# Altium PCB pcbBBB.PcbDoc
Units mm, origin at the board's own origin, x right, y up, seen from the top; angles counter-clockwise.
Board outline 38.02 x 45.73 mm, 2 copper layers (Top Layer, Bottom Layer); 10 components, 47 nets, 39 pads, 0 vias.
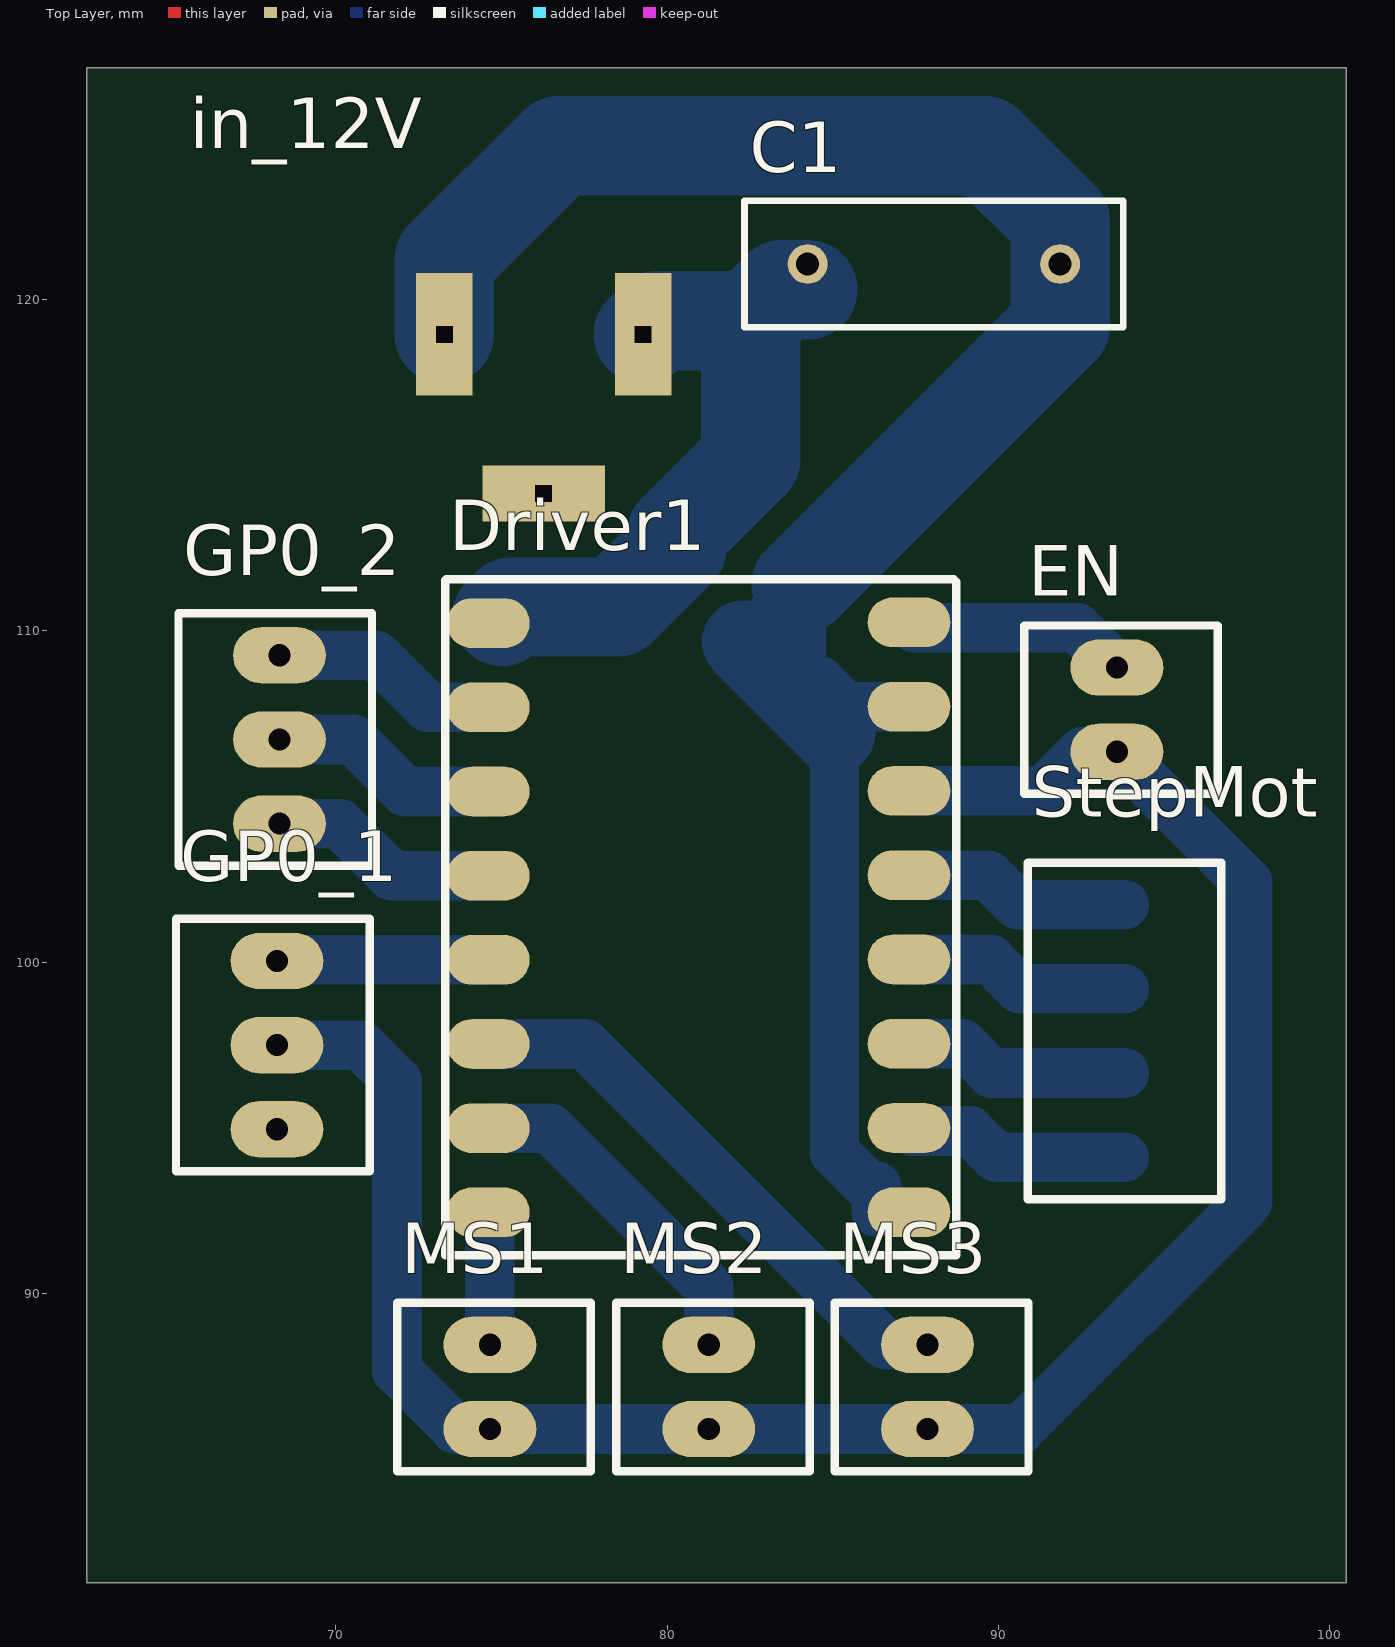
[diagram p0: Top Layer view]
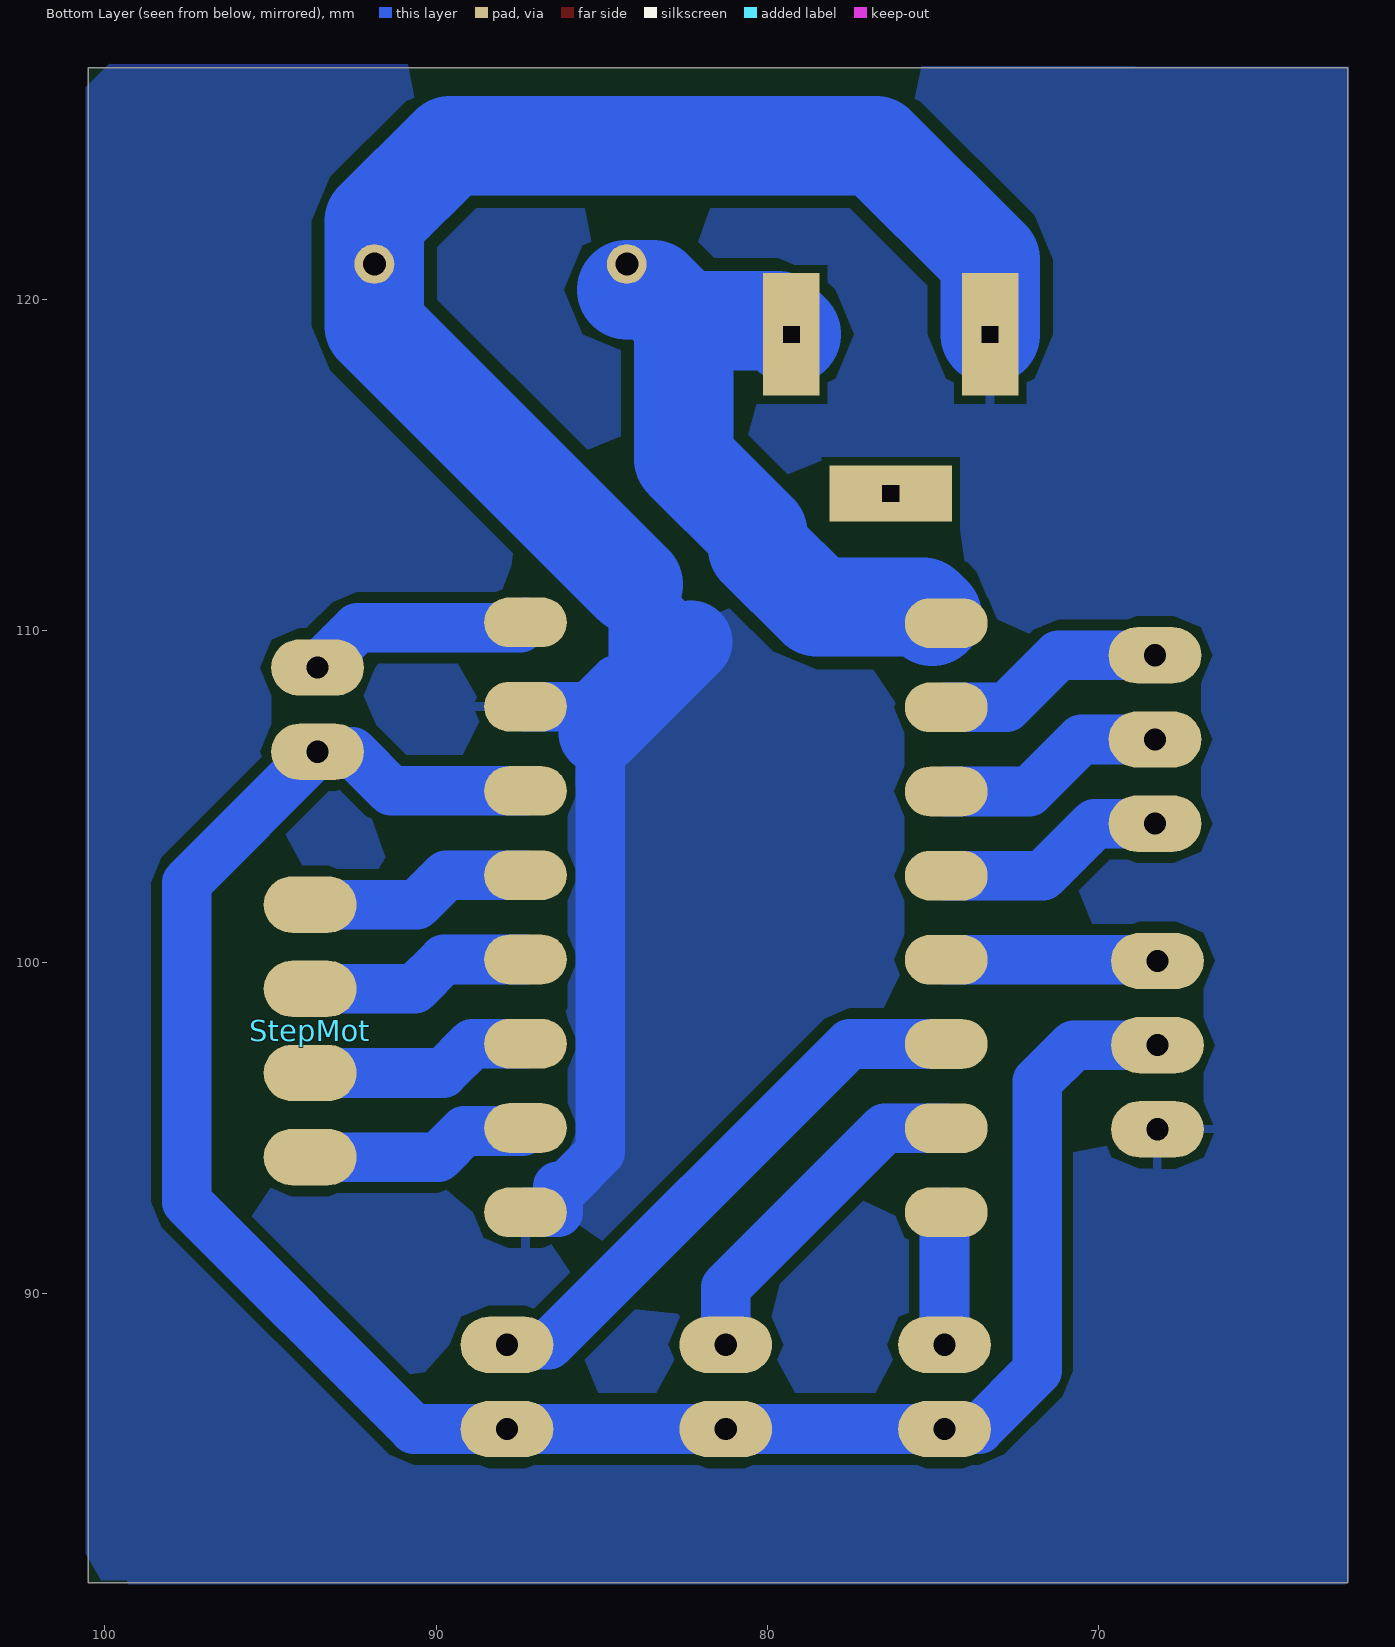
[diagram p1: Bottom Layer view, seen from below]
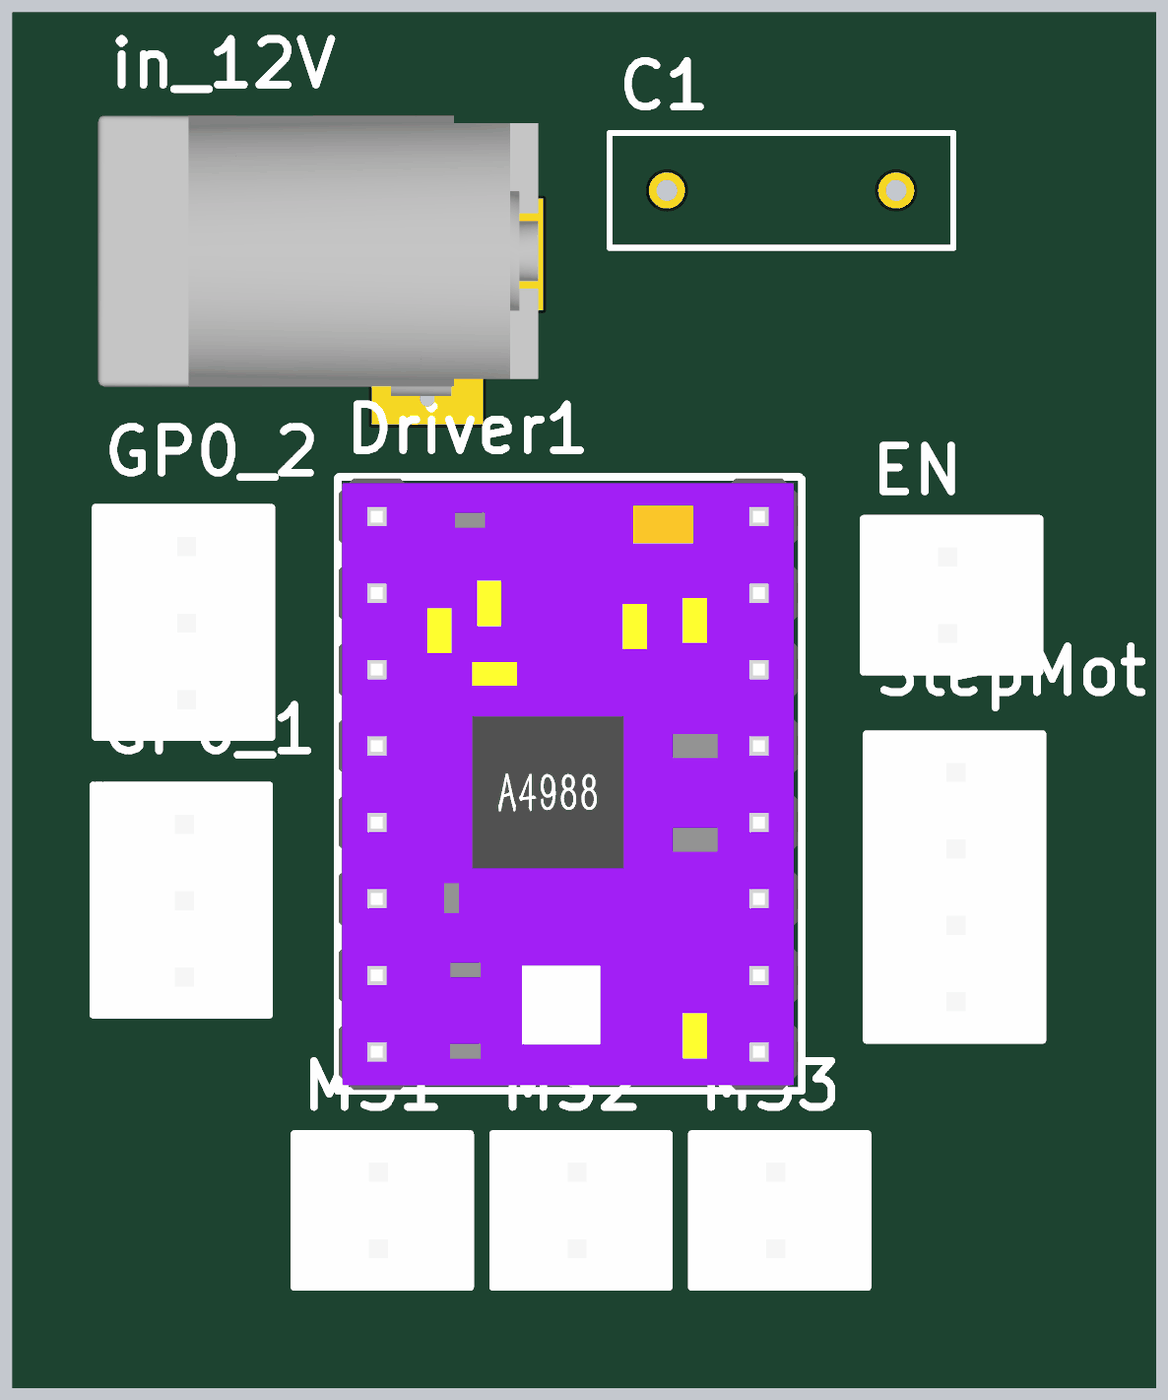
[diagram p2: 3D render of the assembled board from above, using the file's embedded part models]

## Layer stack, top to bottom
Top Solder: solder mask 0.0102, Solder Resist, Dk 3.5
Top Layer: signal copper 0.0356
Dielectric 1: dielectric 0.32, FR-4, Dk 4.8
Bottom Layer: signal copper 0.0356
Bottom Solder: solder mask 0.0102, Solder Resist, Dk 3.5

## Board outline
62.484,81.275 100.5,81.275 100.5,127 62.484,127

## Design rules (kind name [scope] priority, off if disabled: settings)
Clearance [All] p1: gap=0.254 ignorepadtopadclearanceinfootprint=FALSE except(0: Arc-Hole Track-Hole SMDPad-Hole THPad-Hole Via-Hole Fill-Hole Poly-Hole Region-Hole Text-Hole)
PolygonConnect [All] p1: connectstyle=Relief reliefconductorwidth=0.254 reliefentries=4 polygonreliefangle="90 Angle" airgapwidth=0.254
RoutingVias [All] p1: holewidth=0.711 width=1.27 viastyle="Through Hole" minholewidth=0.711 minwidth=1.27 maxholewidth=0.711 maxwidth=1.27
SolderMaskExpansion [All] p1: expansion=0.102
Width [All] p1: maxlimit=4 minlimit=0.254 preferedwidth=1.5
30 further rules are at their usual default settings.

## Components (designator, comment, footprint, x,y, rotation, side; value= is the part's Value field where it differs from the comment)
C1 "Cap" RAD-0.3 88.05,121.075 r180 top value=100pF
Driver1 "A4988" A4988 74.6,92.455 r90 top
EN "KK2" 2-vias 93.575,107.625 r0 top
GP0_1 "KK3" 3-vias 68.225,97.5 r180 top
GP0_2 "KK3" 3-vias 68.3,106.725 r180 top
in_12V "Jack" "JACK J4" 73.275,118.95 r0 top
MS1 "KK2" 2-vias 74.651,87.184 r0 top
MS2 "KK2" 2-vias 81.255,87.184 r0 top
MS3 "KK2" 2-vias 87.859,87.184 r0 top
StepMot "KK4" 4-vias 93.8,94.12 r180 top

## Footprints (in the part's own frame and the unit in brackets; to place one, negate y for a bottom-side part, rotate by r counter-clockwise, add the part's x,y. Pads: shape width x height; smd on the part's side, far side on the other; paste and mask are expansions set on the pad)
2-vias [mm]
  oval 2.8x1.7 hole 0.67 unplated: 1(0,1.27) 2(0,-1.27)
  silkscreen extent -2.79,-2.54 3.05,2.54, body extent -2.87,-2.54 2.97,2.54, height 11.7
3-vias [mm]
  oval 2.8x1.7 hole 0.67 unplated: 1(0,2.54) 2(0,0) 3(0,-2.54)
  silkscreen extent -2.79,-3.81 3.05,3.81, body extent -2.84,-3.78 3,3.84, height 11.7
4-vias [mm]
  oval 2.8x1.7 smd far side: 1(0,0) 2(0,-2.54) 3(0,-5.08) 4(0,-7.62)
  silkscreen extent -2.92,-8.89 2.92,1.27, body extent -2.92,-8.89 2.92,1.27, height 11.7
A4988 [mm]
  oval 1.5x2.5 all layers, no hole: 1(0,0) 2(2.54,0) 3(5.08,0) 4(7.62,0) 5(10.16,0) 6(12.7,0) 7(15.24,0) 8(17.78,0) 9(0,-12.7) 10(2.544,-12.7) 11(5.087,-12.7) 12(7.631,-12.7) 13(10.175,-12.7) 14(12.718,-12.7) 15(15.262,-12.7) 16(17.805,-12.7)
  silkscreen extent -1.3,-14.12 19.1,1.3, body extent -1.27,-13.97 19.05,1.27, height 5.09
"JACK J4" [mm]
  rect 1.7x3.7 hole 0.5 square: 1(6,0) 2(0,0)
  rect 3.7x1.7 hole 0.5 square: 3(3,-4.8)
  body extent -7.94,-4.71 6.68,4.61, height 11
RAD-0.3 [mm] "Radial Cap, Thru-Hole; 2 Leads; 0.3 in Pin Spacing"
  round 1.2 hole 0.7: 1(-3.81,0) 2(3.81,0)
  silkscreen extent -5.71,-1.91 5.71,1.91

## Part data
C1: "Capacitor", LatestRevisionDate=17-Jul-2002, LatestRevisionNote="Re-released for DXP Platform.", PackageDescription="Radial Cap, Thru-Hole; 2 Leads; 0.3 in Pin Spacing", PackageReference=RAD-0.3, Published=8-Jun-2000, Publisher="Altium Limited"
EN MS1 MS2 MS3: library part KK2Vias
GP0_1 GP0_2: library part KK3Vias
StepMot: library part KK4Vias, ComponentLink1Description=Fabricante, ComponentLink1URL=https://www.molex.com/molex/products/family?key=kk_254_rpc_connector_system&channel=products&chanName=family&pageTitle=Introduction&parentKey=kk_interconnect_solutions

## Nets (pads, with @x,y where several pads share a name; then routed paths per layer and width w, separated by ;. In a path a pad name is that pad's centre, name@x,y a point inside that pad or via, vN(x,y) a via of type N, cw(c..) or ccw(c..) an arc to the next point about the centre after c; other vN are vias at no path point)
1A: Driver1.12 StepMot.3 | length 6.9
  Bottom Layer w1.5: Driver1.12 89.759,100.086 90.644,99.2 StepMot.3
1B: Driver1.13 StepMot.4 | length 6.9
  Bottom Layer w1.5: Driver1.13 89.695,102.63 90.585,101.74 StepMot.4
2A: Driver1.11 StepMot.2 | length 6.9
  Bottom Layer w1.5: Driver1.11 88.908,97.542 89.79,96.66 StepMot.2
2B: Driver1.10 StepMot.1 | length 6.9
  Bottom Layer w1.5: Driver1.10 87.393,94.906 89.144,94.906 89.93,94.12 StepMot.1
3.3v: Driver1.14 EN.2 GP0_1.2 MS1.2 MS2.2 MS3.2 | length 64
  Bottom Layer w1.5: GP0_1.2 70.75,97.5 71.85,96.4 71.85,87.678 73.614,85.914 MS1.2 MS2.2 MS3.2 90.664,85.914 97.525,92.775 97.525,102.405 EN.2 92.53,106.355 91.348,105.173 Driver1.14
5V: 
12V: C1.2 Driver1.8 in_12V.1 | length 19.4
  Bottom Layer w3: Driver1.8@75.025,110.449 75.301,110.725 78.5,110.725 80.292,112.517 80.292,112.956 82.525,115.189 82.525,119.36 ; in_12V.1 79.685,119.36 82.525,119.36 ; 84.24,120.296 83.461,120.296 82.525,119.36
ChA_1: 
ChA_2: 
ChA_3: 
ChA_4: 
ChB_1: 
ChB_2: 
ChB_3: 
ChB_4: 
CLK_1: 
CLK_2: 
DIR: Driver1.7 GP0_2.3 | length 7
  Bottom Layer w1.5: GP0_2.3 71.21,109.265 72.78,107.695 Driver1.7
EN: Driver1.16 EN.1 | length 6.8
  Bottom Layer w1.5: Driver1.16 87.46,110.1 92.37,110.1 EN.1
GND: C1.1 Driver1.9 Driver1.15 GP0_1.1 in_12V.2 | length 66.4
  Bottom Layer w1.5: 82.3,109.673 82.318,109.673 84.046,111.401 84.046,108.506 84.594,108.506 85.383,107.717 85.783,107.717 Driver1.15 ; 85.046,106.927 85.046,94.272 86.073,93.245 86.32,93.245 86.32,92.455 Driver1.9
  Bottom Layer w2.5: 82.3,109.673 85.046,106.927
  Bottom Layer w3: in_12V.2 73.275,121.2 76.725,124.65 89.575,124.65 91.86,122.365 C1.1 91.86,119.215 84.046,111.401
MISO_2: 
MOSI_1: 
MOSI_2: 
MotA_1: 
MotA_2: 
MotB_1: 
MotB_2: 
MotC_1: 
MotC_2: 
MotD_1: 
MotD_2: 
MS1: Driver1.1 MS1.1 | length 4
  Bottom Layer w1.5: Driver1.1 74.651,92.404 MS1.1
MS2: Driver1.2 MS2.1 | length 10.4
  Bottom Layer w1.5: Driver1.2 76.455,94.995 81.255,90.195 MS2.1
MS3: Driver1.3 MS3.1 | length 17
  Bottom Layer w1.5: Driver1.3 77.515,97.535 86.596,88.454 MS3.1
NetC2_1: 
NetConv_3V_4: 
NetConv_5V_2: 
NetConv_5V_3: 
RST: Driver1.4 GP0_1.3 | length 6.4
  Bottom Layer w1.5: GP0_1.3 68.26,100.075 Driver1.4
Servo1: 
Servo2: 
Servo3: 
Servo4: 
SLP: Driver1.5 GP0_2.1 | length 7
  Bottom Layer w1.5: GP0_2.1 70.115,104.185 71.685,102.615 Driver1.5
SS_1: 
SS_2: 
STP: Driver1.6 GP0_2.2 | length 7
  Bottom Layer w1.5: GP0_2.2 70.525,106.725 72.095,105.155 Driver1.6
pads on no net: in_12V.3

## Polygon pours and split planes (outlines as drawn)
GND on Bottom Layer "GND_L01_P-001" (solid, pour order 4): 100.575,127.125 100.575,81.275 100.375,81.075 100.1,81.35 62.45,81.35 62.45,127.025
GND on Bottom Layer "GND_L01_P-001" (solid, pour order 2): 62.45,127.025 62.45,81.35 62.575,81.225 100.45,81.225